# Altium PCB PCB.PcbDoc
Units mil, origin at the board's own origin, x right, y up, seen from the top; angles counter-clockwise.
Board outline 2663.91 x 497.56 mil, 2 copper layers (Top1, Bottom4), stack 42.17 mil thick; 41 components, 64 nets, 223 pads, 75 vias.
Unrouted connection lines stored in the file: 56.
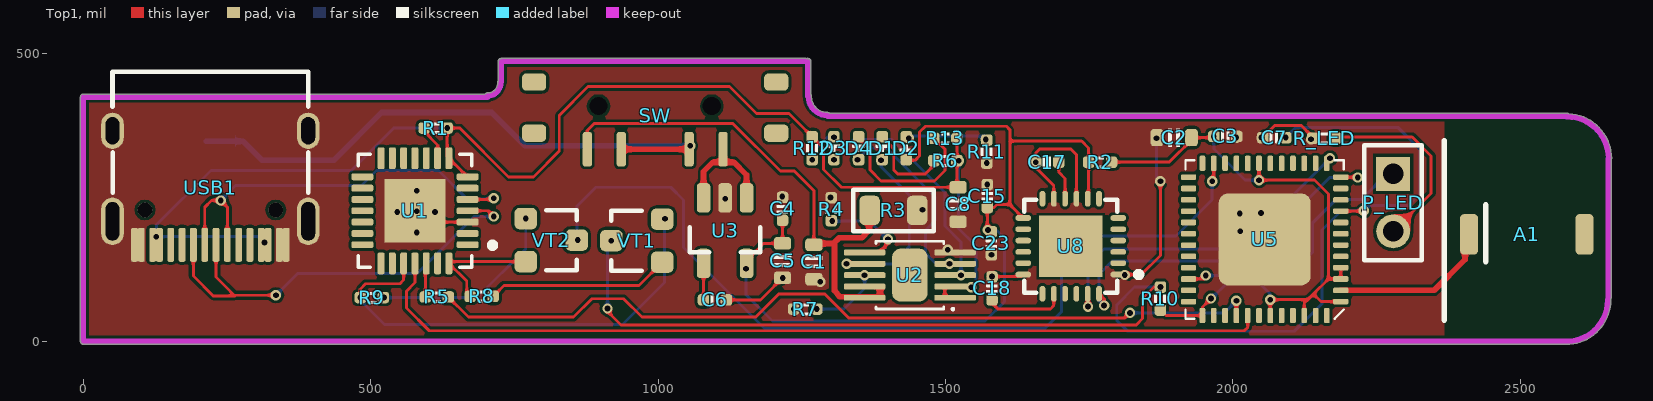
[diagram p0: Top1 view]
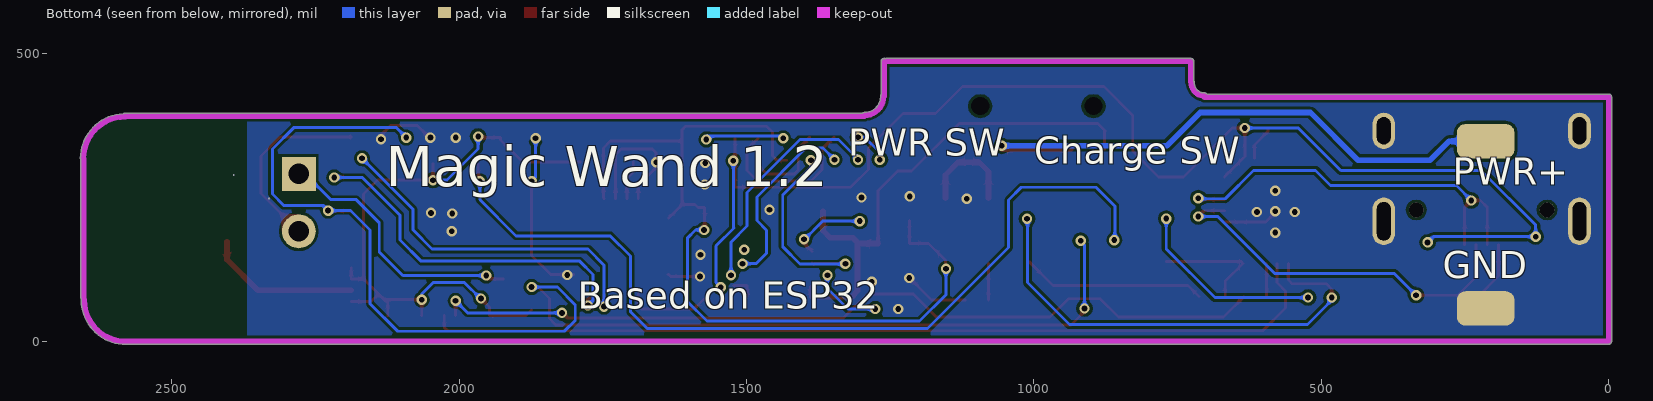
[diagram p1: Bottom4 view, seen from below]
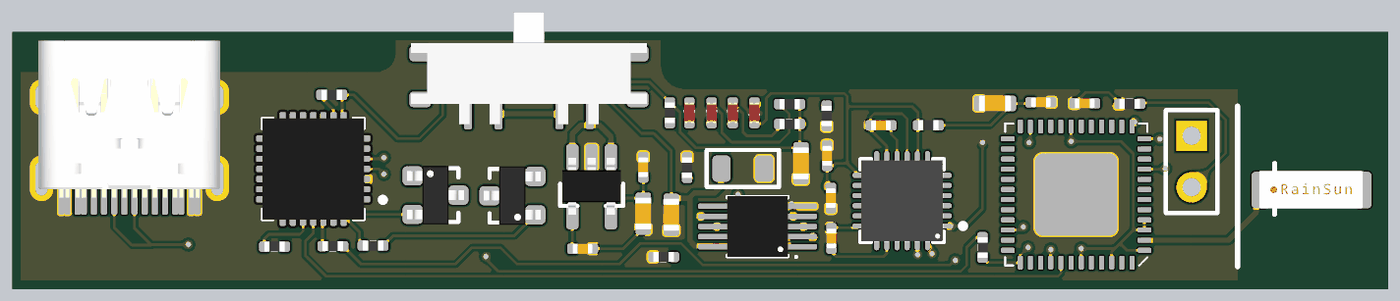
[diagram p2: 3D render of the assembled board from above, using the file's embedded part models]

## Layer stack, top to bottom
Top Solder: solder mask 0.4, Solder Resist, Dk 3.5
Top1: signal copper 1.4
Dielectric 2: core 39.37, PP-006, Dk 4.2
Bottom4: signal copper 1.4
Bottom Solder: solder mask 0.4, Solder Resist, Dk 3.5

## Board outline
-5.01,0 ccw(c0,0) 0,-5.02 2576,-5.02 ccw(c2576,0) 2577.4,-4.82 ccw(c2580,-0.53) 2580,-5.55 ccw(c2580,72) 2657.55,72 ccw(c2652.53,72) 2657.33,73.46 ccw(c2653,76) 2658.02,76 2658.02,315.16 ccw(c2653.88,318) 2658.89,318 ccw(c2581,318) 2584.24,395.83 ccw(c2581,392) 2581,397.02 1298.01,397.01 ccw(c1295,393) 1295,398.02 cw(c1295,426.44) 1266.58,426.44 ccw(c1261.56,426.44) 1265.69,429.29 1265.69,487 ccw(c1260.67,487) 1258.84,491.67 ccw(c1257,487) 1257,492.02 729,492.02 ccw(c729,487) 728,491.91 ccw(c727,487) 721.99,487 721.99,452.98 ccw(c726.08,450.08) 721.06,450.08 cw(c703,450.08) 703,432.02 ccw(c703,427) 698.99,430.02 0,430.02 ccw(c0,425) -5.01,425

## Design rules (kind name [scope] priority, off if disabled: settings)
Clearance [All] p1: gap=5 ignorepadtopadclearanceinfootprint=FALSE
ComponentClearance [All] p1: gap=0 collisioncheckmode=3 verticalgap=0 showdistances=FALSE
DiffPairsRouting [All] p1: maxlimit=9 minlimit=9 mostfreqgap=9 toplayer_minwidth=4 toplayer_maxwidth=4 toplayer_prefwidth=4 bottomlayer_minwidth=4 bottomlayer_maxwidth=4 bottomlayer_prefwidth=4 maxuncoupledlength=500
FanoutControl Fanout_BGA [All] p1: bgadir=Out bgaviamode=Centered fanoutstyle=Auto fanoutdirection=Alternating viagrid=1 // Fanout_BGA (Default Rule)
HoleSize [All] p1: absolutevalues=TRUE maxlimit=10000 minlimit=8 maxpercent=80.000 minpercent=20.000
MinimumSolderMaskSliver [All] p1 off: minsoldermaskwidth=2
PlaneClearance [All] p1: clearance=8
PlaneConnect [All] p1: planeconnectstyle=Direct reliefexpansion=20 reliefentries=4 reliefconductorwidth=10 reliefairgap=10
PolygonConnect [All] p1: connectstyle=Direct reliefconductorwidth=10 reliefentries=4 polygonreliefangle="90 Angle" airgapwidth=10
RoomDefinition Wand [InComponentClass('Wand')] p1: confinementstyle=ConfineIn formatcopy=TRUE lockcomponents=FALSE outline -112,-84 2743,-84 2743,584 -112,584
RoutingVias [All] p1: holewidth=8 width=16 viastyle="Through Hole" minholewidth=6 minwidth=12 maxholewidth=28 maxwidth=50
SilkToBoardRegionClearance [All] p1 off:
SilkToSilkClearance [All] p1: silktosilkclearance=0
SilkToSolderMaskClearance [IsPad] p1: minsilkscreentomaskgap=0 clearancetoexposedcopper=TRUE
SolderMaskExpansion [All] p1: expansion=3
Width BAT [InNet('VBAT')] p1: maxlimit=10 minlimit=10 preferedwidth=10
Width BAT_IN [InNet('VBAT_IN')] p2: maxlimit=10 minlimit=10 preferedwidth=10
Width [All] p3: maxlimit=10000 minlimit=5 preferedwidth=5
20 further rules are at their usual default settings.

## Components (designator, comment, footprint, x,y, rotation, side; value= is the part's Value field where it differs from the comment)
A1 "RAINSUN" ANT-RAINSUN-AN5120 2511,186 r0 top
C1 "10uF" 0603-CAP 1271,138 r270 top value=0.1u
C2 "10uF" 0603-CAP 1898,354.32 r0 top value=0.1u
C3 "0.1uF" CAP_0402 1987,356.32 r180 top value=0.1u
C4 "0.1uF" CAP_0402 1216.5,230.32 r270 top value=0.1u
C5 "10uF" 0603-CAP 1216.5,140.32 r90 top value=0.1u
C6 "10nF" CAP_0402 1099,72 r180 top value=0.1u
C7 "0.1uF" CAP_0402 2072,354.32 r180 top value=0.1u
C8 "10uF" 0603-CAP 1522,238 r90 top value=0.1u
C15 "10nF" CAP_0402 1572.84,252.64 r90 top value=0.1u
C17 "0.1uF" CAP_0402 1677,311.64 r180 top value=0.1u
C18 "2.2nF" CAP_0402 1581,92 r270 top value=0.1u
C23 "0.1uF" CAP_0402 1580,170.32 r90 top value=0.1u
D1 "color?" LED_0402_RED 1390,336 r270 top
D2 "color?" LED_0402_RED 1432,336 r90 top
D3 "color?" LED_0402_RED 1306,336 r270 top
D4 "color?" LED_0402_RED 1349,336 r270 top
P_LED "Header 2" HDR1X2 2279,291.32 r270 top
R1 "10K" RES_0402 613,371 r180 top value=22R
R2 "0R" RES_0402 1769,311.64 r0 top value=22R
R3 "BAT" 0805-L 1409.5,227.63 r0 top value=22R
R4 "2K" RES_0402 1301.5,229.57 r270 top value=22R
R5 "200R" RES_0402 615,77 r180 top value=22R
R6 "1K" RES_0402 1500,314.32 r180 top value=22R
R7 "10K" RES_0402 1256,56 r0 top value=22R
R8 "12K" RES_0402 693,78 r0 top value=22R
R9 "12K" RES_0402 502,76 r0 top value=22R
R10 "10K" RES_0402 1874,74.32 r90 top value=22R
R11 "1K" RES_0402 1572,330 r90 top value=22R
R12 "1K" RES_0402 1268,336 r270 top value=22R
R13 "1K" RES_0402 1500,353 r180 top value=22R
R_LED "1K" RES_0402 2159,353.32 r180 top value=22R
SW "4Pin_sw" 4pin_SW 995,409 r0 top
U1 "CP2102" QFN-28 577,227 r180 top value=Value
U2 "MCP73833T-AMI/MF" QFN_10_L 1438,115 r0 top
U3 "LP2992 3V3" SOT23-5 1116.5,190.32 r270 top
U5 "ESP32_SIP" QFN-48_7X7 2055.38,177.16 r180 top
U8 "MPU6050" QFN-24 1718,165.32 r180 top
USB1 "Type-C" TYPE-C-TOP 221,267 r90 top
VT1 "S8050" SMT_TRIODE_NPN 963,175 r90 top
VT2 "S8050" SMT_TRIODE_NPN 814,176 r270 top

## Footprints (in the part's own frame and the unit in brackets; to place one, negate y for a bottom-side part, rotate by r counter-clockwise, add the part's x,y. Pads: shape width x height; smd on the part's side, far side on the other; paste and mask are expansions set on the pad)
4pin_SW [mil]
  rrect50% 42x30 smd: 0(-210.63,-47) 0(-210.63,42) 0(210.63,-47) 0(210.63,42)
  round 10 hole 31.5: 0(-98.43,0) 0(98.43,0)
  rrect50% 16x60 smd: 1(-118.11,-75) 2(-59.06,-75) 3(59.06,-74.8) 4(118.11,-74.8)
  body extent -228,-95 228,122, height 59
0603-CAP [mil]
  rrect50% 22x30 smd: 1(-30,0) 2(30,0)
  silkscreen extent -10,-15 10,15, body extent -31,-16 32,16, height 31
0805-L [mm]
  rrect50% 0.9x1.3 smd: 1(-1.05,0) 2(1.05,0)
  silkscreen extent -1.78,-0.91 1.78,0.91, body extent -1,-0.6 1,0.6, height 0.76
ANT-RAINSUN-AN5120 [mm] "选择焊盘"
  rrect50% 0.8x1.8 smd: 1(-2.54,0) ""(2.563,0)
  silkscreen extent -1.8,-1.2 -1.8,1.3, body extent -2.57,-0.91 2.54,0.94, height 1.32
CAP_0402 [mil]
  rrect50% 20x20 smd: 1(-20,0) 2(20,0)
  silkscreen extent -7,-9 7,9, body extent -20,-10 20,10, height 20
HDR1X2 [mm] "Connector; Header; 2 Position"
  rect 1.5x1.5 hole 0.9: 1(0,0)
  round 1.5 hole 0.9: 2(2.54,0)
  silkscreen extent -1.27,-1.27 3.81,1.27
LED_0402_RED [mil]
  rrect50% 20x20 smd: 1(-20,0) 2(20,0)
  silkscreen extent -6,-11 6,10, body extent -20,-10 20,10, height 18
QFN-24 [mm] "QFN, 24-Leads, Body 4.1x4.1mm (max), Pitch 0.50mm, IPC Low Density"
  oval 0.7x0.25 smd: 1(-2.1,1.25) 2(-2.1,0.75) 3(-2.1,0.25) 4(-2.1,-0.25) 5(-2.1,-0.75) 6(-2.1,-1.25) 13(2.1,-1.25) 14(2.1,-0.75) 15(2.1,-0.25) 16(2.1,0.25) 17(2.1,0.75) 18(2.1,1.25)
  oval 0.25x0.7 smd: 7(-1.25,-2.1) 8(-0.75,-2.1) 9(-0.25,-2.1) 10(0.25,-2.1) 11(0.75,-2.1) 12(1.25,-2.1) 19(1.25,2.1) 20(0.75,2.1) 21(0.25,2.1) 22(-0.25,2.1) 23(-0.75,2.1) 24(-1.25,2.1)
  rect 2.8x2.7 smd: ""(0,0)
  silkscreen extent -3.13,-2.05 2.05,2.05, body extent -2.02,-2.02 2.02,2.02, height 0.95
QFN-28 [mil]
  rrect50% 38x12 smd mask+5: 1(-91.5,59.06) 2(-91.5,39.37) 3(-91.5,19.68) 4(-91.5,0) 5(-91.5,-19.69) 6(-91.5,-39.37) 7(-91.5,-59.06) 15(91.5,-59.06) 16(91.5,-39.37) 17(91.5,-19.69) 18(91.5,0) 19(91.5,19.68) 20(91.5,39.37) 21(91.5,59.06)
  rrect50% 12x38 smd mask+5: 8(-59.06,-91.5) 9(-39.37,-91.5) 10(-19.69,-91.5) 11(0,-91.5) 12(19.68,-91.5) 13(39.37,-91.5) 14(59.06,-91.5) 22(59.06,91.5) 23(39.37,91.5) 24(19.68,91.5) 25(0,91.5) 26(-19.69,91.5) 27(-39.37,91.5) 28(-59.06,91.5)
  rect 106.3x110.24 smd: 29(0,0)
  silkscreen extent -140,-99 99,99, body extent -99,-99 98,98, height 35
QFN-48_7X7 [mm]
  rrect20% 4.064x4.064 smd: 0(0,0)
  rrect50% 0.675x0.25 smd: 1(-3.363,2.75) 2(-3.363,2.25) 3(-3.363,1.75) 4(-3.363,1.25) 5(-3.363,0.75) 6(-3.363,0.25) 7(-3.363,-0.25) 8(-3.363,-0.75) 9(-3.363,-1.25) 10(-3.363,-1.75) 11(-3.363,-2.25) 12(-3.363,-2.75) 25(3.363,-2.75) 26(3.363,-2.25) 27(3.363,-1.75) 28(3.363,-1.25) 29(3.363,-0.75) 30(3.363,-0.25) 31(3.363,0.25) 32(3.363,0.75) 33(3.363,1.25) 34(3.363,1.75) 35(3.363,2.25) 36(3.363,2.75)
  rrect50% 0.25x0.675 smd: 13(-2.75,-3.363) 14(-2.25,-3.363) 15(-1.75,-3.363) 16(-1.25,-3.363) 17(-0.75,-3.363) 18(-0.25,-3.363) 19(0.25,-3.363) 20(0.75,-3.363) 21(1.25,-3.363) 22(1.75,-3.363) 23(2.25,-3.363) 24(2.75,-3.363) 37(2.75,3.363) 38(2.25,3.363) 39(1.75,3.363) 40(1.25,3.363) 41(0.75,3.363) 42(0.25,3.363) 43(-0.25,3.363) 44(-0.75,3.363) 45(-1.25,3.363) 46(-1.75,3.363) 47(-2.25,3.363) 48(-2.75,3.363)
  silkscreen extent -3.5,-3.5 3.5,3.5, body extent -3.5,-3.5 3.5,3.5, height 1
QFN_10_L [mm]
  rrect50% 1.84x0.26 smd: 1(2,-1) 2(2,-0.5) 3(2,0) 4(2,0.5) 5(2,1) 6(-2,1) 7(-2,0.5) 8(-2,0) 9(-2,-0.5) 10(-2,-1)
  rrect50% 1.58x2.35 smd: 11(0,0)
  silkscreen extent -1.5,-1.55 1.95,1.5, body extent -1.5,-1.5 1.5,1.5, height 0.6
RES_0402 [mil]
  rrect50% 20x20 smd: 1(-20,0) 2(20,0)
  silkscreen extent -7,-10 7,10, body extent -20,-10 20,10, height 14
SMT_TRIODE_NPN [mm] "Surface mount NPN transistor, package SOT-23"
  rrect50% 0.95x1 smd: 1(-0.95,-1.125) 2(0.95,-1.125) 3(0,1.125)
  silkscreen extent -1.33,-0.22 1.32,1.13, body extent -1.45,-1.4 1.45,1.4, height 1.3
SOT23-5 [mm] "SOT23, 3-Leads, Body 3.1x3.0mm (max), Pitch 0.95mm, IPC Medium Density"
  rrect50% 1.3x0.6 smd: 1(-1.5,0.95) 2(-1.5,0) 3(-1.5,-0.95) 4(1.396,-0.95) 5(1.396,0.95)
  silkscreen extent -0.2,-1.55 0.9,1.55, body extent -1.48,-1.45 1.32,1.45, height 1.2
TYPE-C-TOP [mm]
  round 0.65 hole 0.65: 0(-0.98,2.89) 0(-0.98,-2.89)
  oval 1.6x1 hole 0.6 slot 1.2 at 0 deg: 1(2.52,4.325) 2(2.52,-4.325)
  oval 2.1x1 hole 0.6 slot 1.7 at 0 deg: 3(-1.48,-4.325) 4(-1.48,4.325)
  rrect50% 1.5x0.3 smd: A1(-2.52,-3.35) A4(-2.52,-2.55) A5(-2.52,-1.25) A6(-2.52,-0.25) A7(-2.52,0.25) A8(-2.52,1.25) A9(-2.52,2.55) A12(-2.52,3.35) B1(-2.52,3.05) B4(-2.52,2.25) B5(-2.52,1.75) B6(-2.52,0.75) B7(-2.52,-0.75) B8(-2.52,-1.75) B9(-2.52,-2.25) B12(-2.52,-3.05)
  silkscreen extent -0.22,-4.33 5.12,4.33, body extent -2.44,-4.48 5.31,4.48, height 3.26

## Part data
A1: library part ANT-Rainsun-AP5120
C1 C2 C5 C8: library part 电容-0603, "Capacitor"
C3 C4 C6 C7 C15 C17 C18 C23: library part 电容-0402, "Capacitor"
D1 D2 D3 D4: library part LED_0402, "LED", Type=0402
P_LED: "Header, 2-Pin", LatestRevisionDate=17-Jul-2002, LatestRevisionNote="Re-released for DXP Platform.", Publisher="Altium Limited"
R1 R2 R4 R5 R6 R7 R8 R9 R10 R11 R12 R13 R_LED: library part 电阻-0402, "Resistor"
R3: library part 电阻-0805, "Resistor"
U1: "USBתTTL", MFG #1="SILICON LABS", PART DESC="SINGLE-CHIP USB TO UART BRIDGE, QFN28, RoHS.", PART NUMBER=CP2102, RefDes=RefDes, Type=DEV
U2: library part MCP73833T, "Linear Charge Management Controller Li-Ion/Li-Pol 1mA 4.2V/4.35V/4.4V/4.5V 10-Pin DFN EP T/R", Package="DFN-10 Microchip", Availability=Unavailable, MF=Microchip, MP=MCP73833T-AMI/MF, Price=None, SnapEDA_Link=https://www.snapeda.com/parts/MCP73833T-AMI/MF/Microchip/view-part/?ref=snap
U3: library part LP2992, "LDO"
U5: library part ESP32-PICO
U8: "六轴传感器"
USB1: library part USB-Type-C-TOP
VT1 VT2: library part SMT_TRIODE_NPN, "Surface mount NPN transistor, package SOT-23"

## Free pads (board coordinates)
  rrect50% 100x60 smd far side: ""(214,57) ""(214,348)

## Via types
v1: diameter 18, hole 10, Top1 to Bottom4, tented both sides, 75 vias

## Nets (pads, with @x,y where several pads share a name; then routed paths per layer and width w, separated by ;. In a path a pad name is that pad's centre, name@x,y a point inside that pad or via, vN(x,y) a via of type N, cw(c..) or ccw(c..) an arc to the next point about the centre after c; other vN are vias at no path point)
3V3: C4.2 C5.2 C15.1 C23.2 D2.1 R2.1 U3.5 U8.8 U8.13 | length 1501.6
  Top1 w5: U3.5 1153.91,140.91 1183.31,170.32 C5.2 C4.2 ; D2.1@1430,315 1447.36,315 1455,322.64 1455,364 1465,374 1606,374 1612,368 1612,348.32 ; v1(1573.84,193.64) 1572.84,194.64 C15.1 1584.32,232.64 1589.54,237.85 1612,237.85 ; U8.13 1612,237.85 ; U8.8 1749,249.46 R2.1 1749,336.32 1737,348.32 1612,348.32 ; 1612,237.85 1612,348.32
  Bottom4 w5: v1(1153,126) 1153,81 1199,35 1568.69,35 1603,69.32 1603,179.32 1588.68,193.64 v1(1573.84,193.64)
3V3A: C2.2 C3.2 R2.2 R10.1 U5.1 U5.3 U5.4 U5.19 U5.37 U5.43 U5.46 | length 1143.4
  Top1 w5: R2.2 1889.32,311.64 1928,350.32 C2.2 1965,354.31 v1(1967,356.32) ; R10.1 1883.54,44.78 U5.37 1947.11,59.43 v1(1962,74.32) ; U5.19 v1(2045.54,280.32) 2142,280.32 2166.18,256.13 2166.18,108.26 ; U5.43 2065,45 v1(2065,72.32) 2130.24,72.32 ; U5.46 2124.28,66.36 2130.24,72.32 ; U5.1 2153.19,68.89 2140,82.08 ; U5.4 U5.3 2166.18,108.26 ; 2130.24,72.32 2140,82.08 ; 2140,82.08 2166.18,108.26
  Bottom4 w5: v1(1962,74.32) 1963,74.32 1991,102.32 2045,102.32 2065,82.32 v1(2065,72.32) ; v1(1967,356.32) 1967,334.32 2021,280.32 v1(2045.54,280.32)
CP_Rx: U1.25 U5.41 | length 1587
  Top1 w5: U1.25 577,102 562,87 562,58 601.69,18.32 2020,18.32 2025.85,24.17 U5.41
CP_Tx: R5.1 U5.40 | length 1483
  Top1 w5: R5.1 670,42 853,42 885,74 940,74 972,42 1170,42 1210,82 1290,82 1331.69,40.32 1811,40.32 v1@1820,49.32 ; U5.40 v1(2006.17,70.32)
  Bottom4 w5: v1(1821,49.32) 1985.17,49.32 v1(2006.17,70.32)
DTR: R8.1 U1.28 VT2.2 | length 205.3
  Top1 w5: R8.1@667,78 667,104.56 U1.28 639.15,138.6 VT2.2
EN: C7.1 R10.2 U5.9 VT1.3 | length 2344.8
  Top1 w5: v1(912,57) 912,52 935.69,28.32 1832,28.32 1843,39.32 1843,74.32 1863,94.32 v1(1874,94.32) ; U5.9 2227.06,226.37 v1(2228,227.32)
  Bottom4 w5: v1(912,57) 912,167.71 919,174.71 v1(918.71,175) ; v1(1874,94.32) 1829,94.32 1798,63.32 1798,36.32 1817,17.32 2107,17.32 2155,65.32 2155,193.32 2189,227.32 v1(2228,227.32) 2237,236.32 2305.31,236.32 2325,256 2325,334.32 2287.72,371.59 2109.28,371.59 v1(2092,354.32)
FLASH_CLK: U5.31
FLASH_CS: U5.25
FLASH_SD0: U5.27
FLASH_SD1: U5.33
FLASH_SD2: U5.30
FLASH_SD3: U5.32
GND: C1.2 C2.1 C3.1 C4.1 C5.1 C6.1 C7.2 C8.1 C15.2 C17.2 C18.1 C23.1 pad.@214,57 R3.2 R4.1 R7.1 R11.1 R_LED.2 U1.3 U1.29 U2.5 U3.2 U5.0 U8.1 U8.9 U8.11 U8.18 USB1.1 USB1.2 USB1.3 USB1.4 USB1.A1 USB1.A12 USB1.B1 USB1.B12 | length 922
  Top1 w5: U1.29 596.69,207.32 U1.3 ; C6.1 1178.19,72 C5.1 ; C18.1@1573.84,112.64 1631.86,112.64 U8.18 U8.18@1636.79,116.1 ; U8.11 1688.47,270.84 1657,302.32 v1(1657,311.64) 1657,327.32 1664,334.32 1718,334.32 1727.84,324.47 U8.9 ; U8.1 1840.79,116.1 1874,149.32 v1(1874,278.32) ; C7.2 2073,375.32 2119,375.32 R_LED.2@2139,355.32
  Bottom4 w5: v1(1867,353.32) 1867,285.32 v1(1874,278.32)
  other v1: 1236,56 1282,103.32 1217,110 1581,112.64 1812,115.32 1580,150.32 1504,159.32 580,189 2013,191.32 2012,222.32 2049,223.32 546,225 612,225 580,226 1460,229 1117,248 1300,250 1216,252 580,262 1572.84,272.64 1572,310 2136,351.32 2006,354.32 2050,354.32
GPIO0: U5.23 VT2.3 | length 1541.3
  Top1 w5: v1(1964,278.32) 1966.8,281.11 U5.23
  Bottom4 w5: v1@859,177 859,235 892,268 1022,268 1044,246 1044,163 1185,22 1672.69,22 1702,51.32 1702,148.32 1737,183.32 1901,183.32 1964,246.32 v1(1964,278.32)
  other v1: 860,176
GPIO2: U5.22
GPIO4: U5.24
GPIO5: P_LED.1 U5.34 | length 457.4
  Top1 w5: U5.34 1947.94,108.26 v1@1954,114.32
  Bottom4 w5: v1(1953,114.32) 2098,114.32 2139,155.32 2139,206.32 2179,246.32 2223,246.32 P_LED.1@2272,295.32
GPIO9: U5.28
GPIO10: U5.29
GPIO12: U5.18
GPIO13: U5.20
GPIO14: U5.17
GPIO15: U5.21
GPIO18: U5.35
GPIO19: U5.38
GPIO21: U5.42
GPIO22: U5.39
GPIO23: U5.36
GPIO25: U5.14
GPIO26: U5.15
GPIO27: U5.16
GPIO32: U5.12 U8.24 | length 657.8
  Top1 w5: U8.24 1776,73.85 v1(1776,62.32) ; U5.12 2216.94,285.43 v1@2218,284.37
  Bottom4 w5: v1(1776,62.32) 1767,71.32 1767,116.17 1790.14,139.32 2066,139.32 2103,176.32 2103,219.32 2168.58,284.9 v1(2217.47,284.9)
GPIO33: U5.13 U8.23 | length 613.7
  Top1 w5: U8.23 1748,82.17 v1(1748,60.32)
  Bottom4 w5: v1(1748,60.32) 1748,132.32 1776,160.32 2047,160.32 2080,193.32 2080,229.32 v1(2169,318.32)
GPIO34: U5.10
GPIO35: U5.11
GPIO37: U5.6
GPIO38: U5.7
NetA1_1: A1.1 U5.2 | length 269.4
  Top1 w10: U5.2 2350.57,88.57 2404,142 A1.1@2404,173
NetC1_1: C1.1 R3.1 SW.1 U2.9 U2.10 | length 895.5
  Top1 w5: SW.1 876.89,366.89 889,379 1130,379 1213,296 1237,296 1271,262 1271,170 C1.1
  Top1 w10: C1.1@1271,170 1304.94,170 1315.13,180.2 1354.73,180.2 1367,192.46 R3.1@1367,226 ; 1307,169.39 1307,88 1316,77.26 1386.01,77.26 U2.9@1386.01,94
NetC6_2: C6.2 U3.4 | length 63.4
  Top1 w5: C6.2 1079.1,72.1 U3.4
NetC17_1: C17.1 U8.10 | length 68.3
  Top1 w5: C17.1 1697,294.32 1708.16,283.16 U8.10
NetC18_2: C18.2 U8.20 | length 144.2
  Top1 w5: C18.2@1573.84,72.64 1574.68,72.64 1591,56.32 1682.47,56.32 1688.47,62.32 U8.20
NetD1_1: D1.1 R6.2 | length 152.5
  Top1 w5: D1.1@1390,355 1410,335 1410,298 1416.69,291.32 1465.31,291.32 1480,306 R6.2
NetD1_2: D1.2 U2.7 | length 353
  Top1 w5: v1(1328,135) 1381.32,135 1383.01,133.32 U2.7@1386.01,136.32
  Bottom4 w5: v1(1328,135) 1328.69,134.32 1407,134.32 1437,164.32 1437,254.32 1388.16,303.16 1388,303 v1(1388,315)
NetD2_2: D2.2 R11.2 | length 150.1
  Top1 w5: D2.2@1430,355 1432,353 v1(1436,353) ; R11.2@1571,351 R11.2
  Bottom4 w5: v1@1434,356.83 1570,356.83 v1(1570,351)
NetD3_1: D3.1 R12.2 | length 61.4
  Bottom4 w5: v1(1268,316) 1268,328.32 1294.69,355 v1(1306,355)
NetD3_2: D3.2 U2.3 | length 402.2
  Bottom4 w5: v1@1305,316 1340,351 1407,351 1499,259 1499,200.32 1527,172.32 v1(1527,115)
  other v1: 1306,316
NetD4_1: D4.1 R13.2 | length 274.9
  Top1 w5: D4.1@1348,355 1369,334 1369,298 1388,279 1481,279 1499,297 1499,334 R13.2
NetD4_2: D4.2 U2.4 | length 333
  Bottom4 w5: v1(1347,316) 1367,336 1397,336 1482,251 1482,210 1465,193 1465,153 1483,135 v1(1507,135)
NetP_LED_2: P_LED.2 R_LED.1 | length 330
  Top1 w5: R_LED.1@2187,355.32 2312,355.32 2345,322.32 2345,257.32 P_LED.2
NetR1_2: R1.2 U1.9 | length 62.2
  Top1 w5: R1.2 593,365 616.37,341.63 U1.9
NetR4_2: R4.2 U2.6 | length 137.6
  Top1 w5: U2.6@1386.01,156 1400,169.99 v1(1400,177.32)
  Bottom4 w5: v1(1303,209) 1367.31,209 v1@1400,176.32
NetR5_2: R5.2 U1.26 | length 59.2
  Top1 w5: R5.2 595,133.82 U1.26
NetR7_2: R7.2 U2.8 | length 121.4
  Bottom4 w5: v1(1276,56) 1323.69,56 1359.26,91.57 v1(1359.26,115)
NetR8_2: R8.2 VT1.1 | length 319
  Top1 w5: R8.2 732,97 966.69,97 VT1.1
NetR9_2: R9.2 VT2.1 | length 334.5
  Bottom4 w5: v1(523,76) 685,76 769.71,160.71 v1(769.71,213.4)
RTS: R9.1 U1.24 VT1.2 | length 818.3
  Top1 w5: v1(482,76) 482,91 491,100 551,100 557.32,106.32 U1.24
  Bottom4 w5: v1(482,76) 482,71 524,29 938,29 1011,102 v1@1011,212.84
  other v1: 1012,213
SENSOR_VN: U5.8
SENSOR_VP: U5.5
USB-PWR-DM: U1.5 USB1.A7 USB1.B7 | length 742.8
  Top1 w5: USB1.A7 211.16,233.16 223,245 v1(239,245) 250.53,233.47 USB1.B7 ; U1.5 711.69,246.69 v1(714,249)
  Bottom4 w5: v1(239,245) 265,271 484,271 510,297 618,297 667,248 712,248 v1@713,249
USB-PWR-DP: U1.4 USB1.A6 USB1.B6 | length 800.3
  Top1 w5: USB1.B6 191.47,113.53 226,79 263.69,79 ; USB1.A6 230.84,111.84 263.69,79 ; v1(335,80) 264.69,80 263.69,79 ; U1.4 704,227 v1(714,217)
  Bottom4 w5: v1(335,80) 373,118 581,118 680,217 v1(714,217)
VBAT: SW.4 U3.1 U3.3 | length 176.7
  Top1 w10: U3.3 1079.1,295.1 1095.64,311.64 1131.76,311.64 1153.91,289.49 U3.1
VBAT_IN: pad.@214,348 SW.2 SW.3 | length 1032.3
  Top1 w10: SW.2 1053.86,334 SW.3
  Bottom4 w10: pad.@214,348 278,348 311,315 436,315 519,398 710.65,398 768.65,340 v1(1056,340)
VDD_5V: C8.2 R1.1 R6.1 R12.1 R13.1 U1.7 U1.8 U2.1 U2.2 USB1.A4 USB1.A9 USB1.B4 USB1.B9 | length 2373.4
  Top1 w5: U1.7 U1.8 633,321.56 v1(633,371) 655,371 740,286 783,286 828,331 828,393 878,443 1124,443 1171,396 1228,396 R12.1 1288,336 1288,299 1319,268 C8.2 1520,270 R6.1 R13.1 ; U2.1@1499,77.26 1499,96.94 U2.2@1522.84,96.94
  Bottom4 w5: v1(315,172) 305,182 v1(127,182) 127,202 222,297 466,297 540,371 v1(633,371) ; v1(1523,314) 1523,198 1522,197 1553,166 1553,102 v1(1545,94)
pads on no net: A1. SW.0 U1.1 U1.2 U1.6 U1.10 U1.11 U1.12 U1.13 U1.14 U1.15 U1.16 U1.17 U1.18 U1.19 U1.20 U1.21 U1.22 U1.23 U1.27 U2.11 U5.26 U5.44 U5.45 U5.47 U5.48 U8. U8.2 U8.3 U8.4 U8.5 U8.6 U8.7 U8.12 U8.14 U8.15 U8.16 U8.17 U8.19 U8.21 U8.22 USB1.0 USB1.A5 USB1.A8 USB1.B5 USB1.B8

## Polygon pours and split planes (outlines as drawn)
GND on Top1 "Top1-GND" (solid, pour order 10): 703,425 727,449 727,485 729,487 1260.67,487 1260.67,426.44 1295,392.11 1295,392 2369,392 2368,391 2368,0 0,0 0,425
no net on Top1 "Top1-No Net" (solid, pour order 6): 0,425
GND on Bottom4 "Bottom4-GND" (solid, pour order 12): 0,425 703,425 726.08,448.08 726.08,484.08 729,487 1260.67,487 1260.67,426.44 1295,392.11 1295,392 2368,392 2369,391 2369,0 0,0

## Keep-outs
Keep-Out Layer:
  lines w10: 703,425 580.67,425 0,425 0,0 2576,0 ; 703,427 ccw(c703,450.08) 726.08,450.08 727,451 727,487 ; 729,487 1257,487 ; 1260.67,426.44 1260.67,487 ; 1261.56,426.44 ccw(c1295,426.44) 1295,393 ; 1295,392 2581,392 ; 2580,-0.53 ccw(c2580,72) 2652.53,72 ; 2581,390.88 cw(c2581,318) 2653.88,318 ; 2653,76 2653,318

## Silkscreen, mask and mechanical layers (free items; w line width, h text height)
Top Overlay:
  lines w10: 2368,37 2368,349
Bottom Overlay:
  lines w1: 2330,247 2331,247 ; 2330,248 2331,248 ; 2330,249 2331,249 ; 2391,289 2393,289
  text "PWR SW" at 1323,307 h80
  text "Charge SW" at 999,293 h80
  text "PWR+" at 271,257 h80
  text "Magic Wand 1.2" at 2128,246 h120
  text "GND" at 289,94 h80
  text "Based on ESP32" at 1794,41 h80